# Altium PCB MasterBoardRevA.PcbDoc
Units mil, origin at the board's own origin, x right, y up, seen from the top; angles counter-clockwise.
Board outline 3993.07 x 3500.14 mil, 2 copper layers (Top Layer, Bottom Layer); 62 components, 48 nets, 251 pads, 28 vias.
Unrouted connection lines stored in the file: 2.
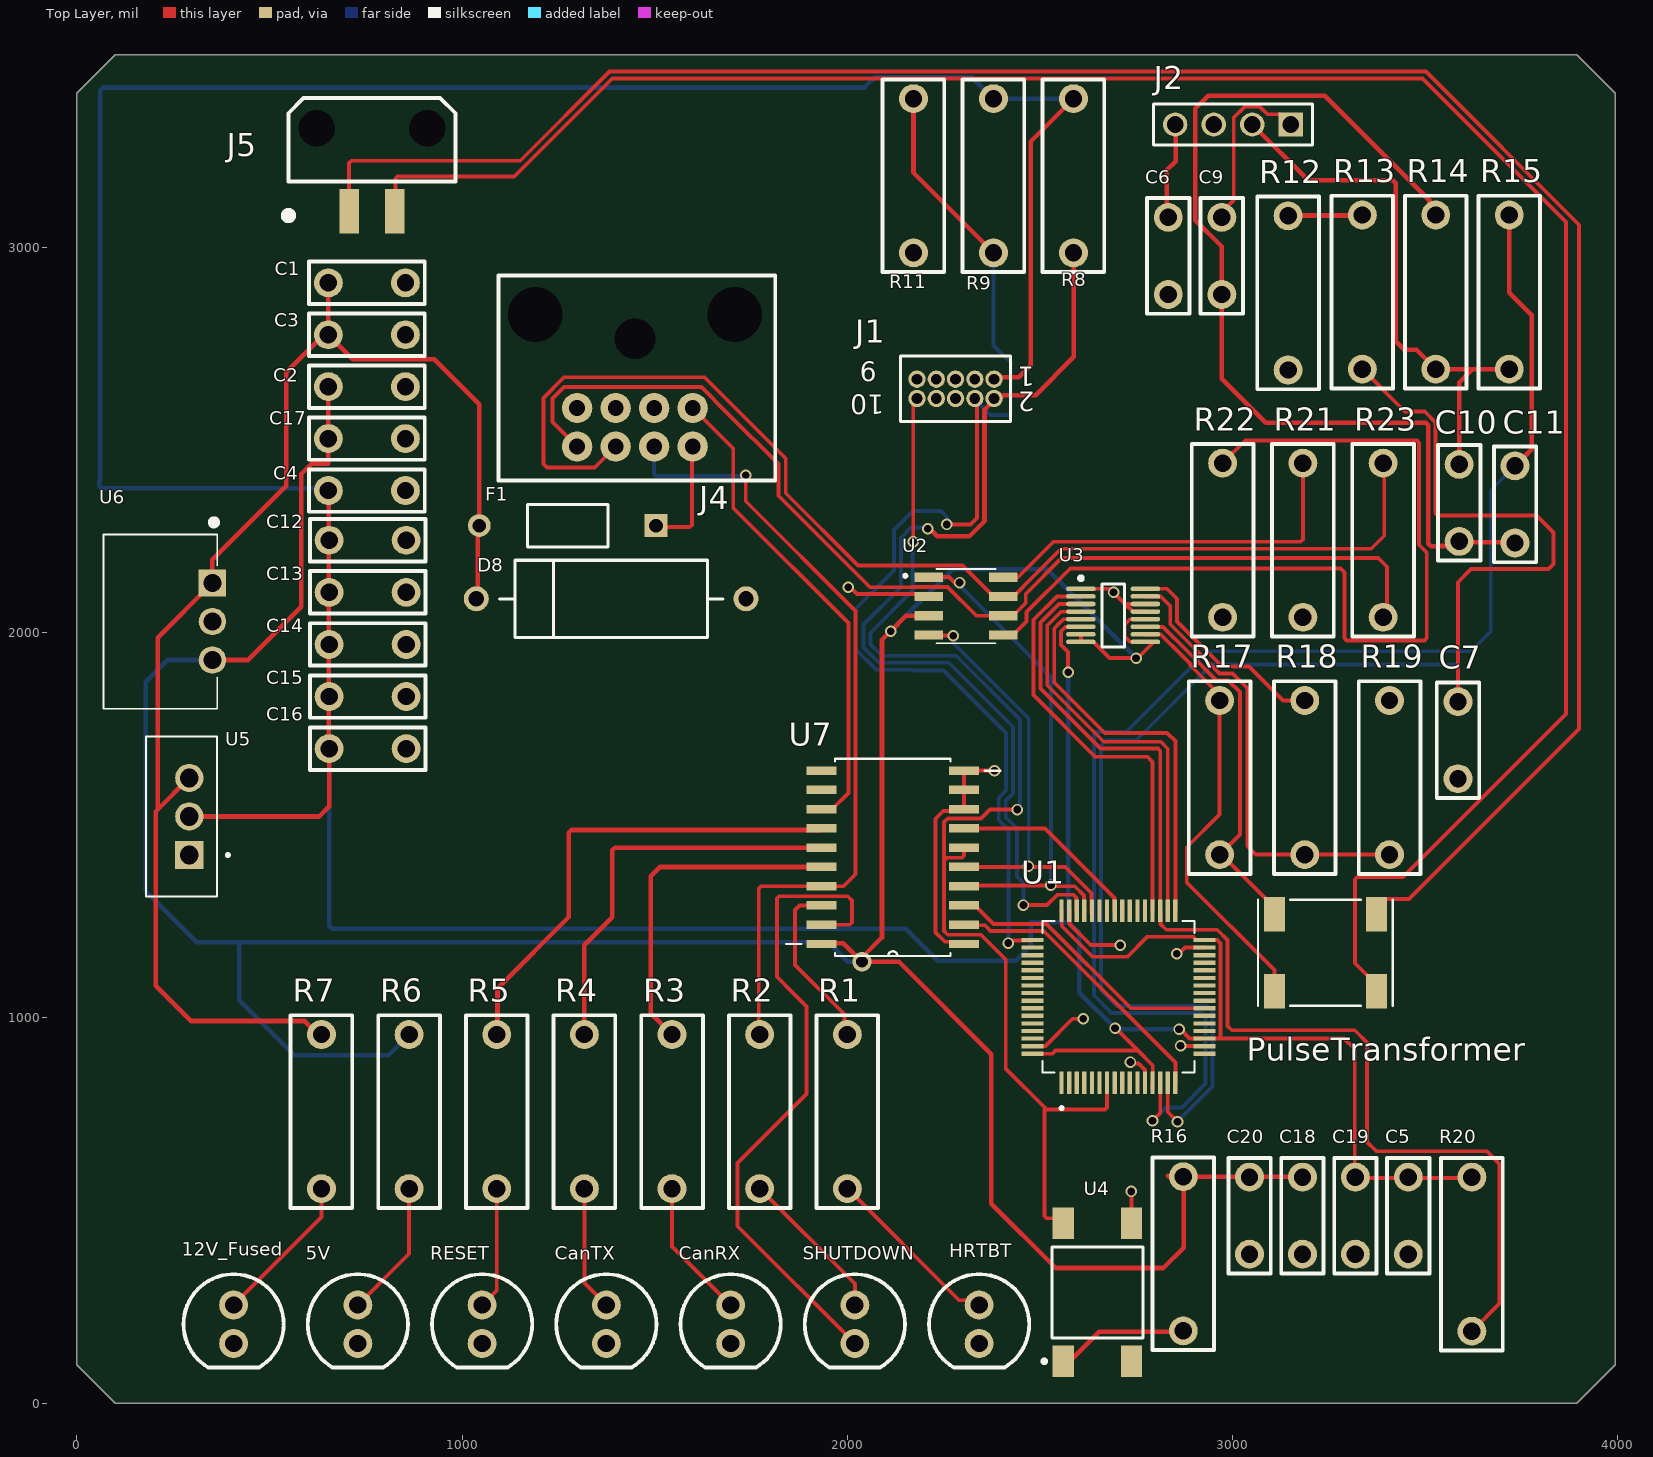
[diagram p0: Top Layer view]
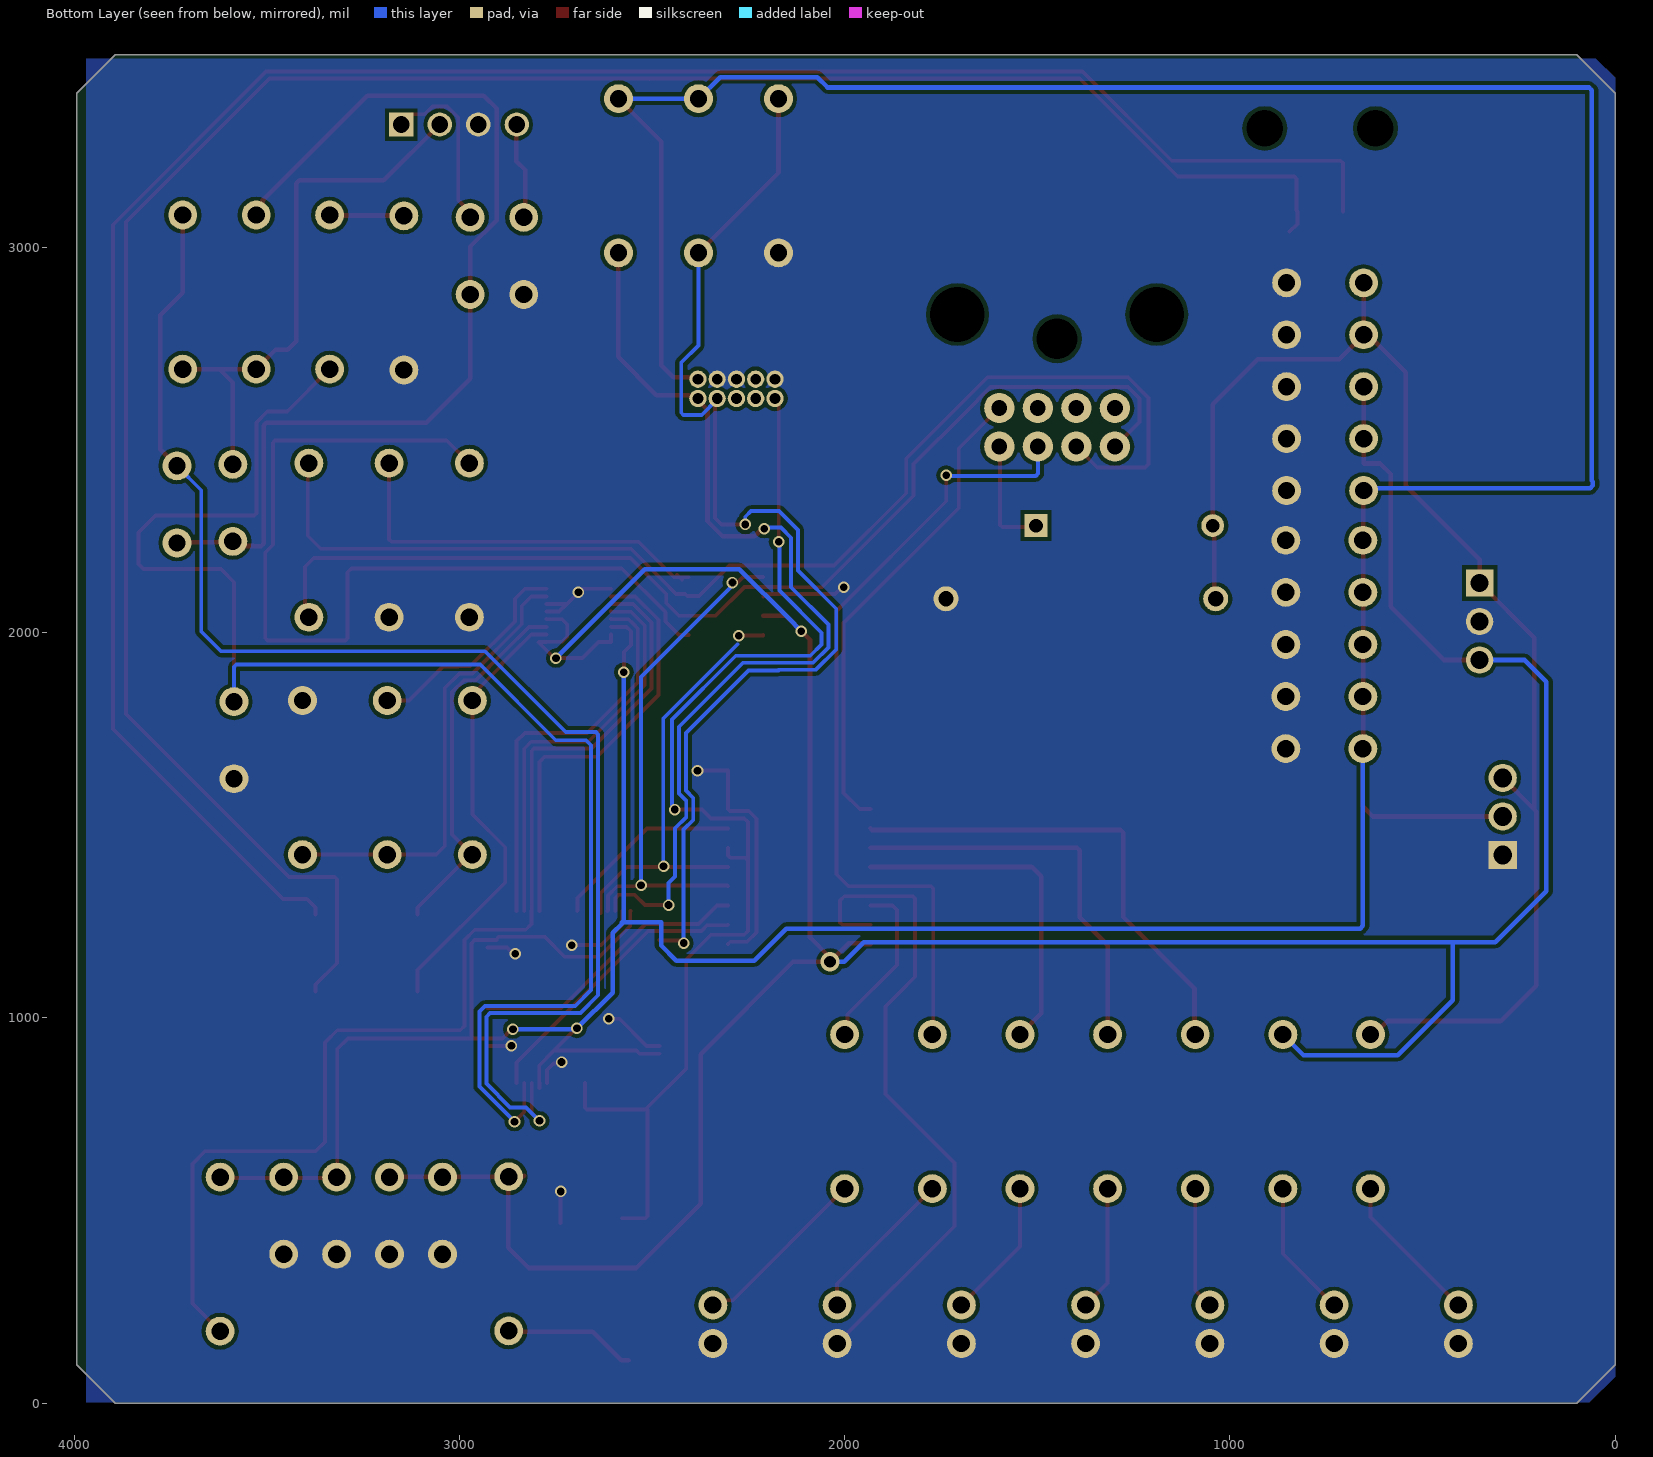
[diagram p1: Bottom Layer view, seen from below]
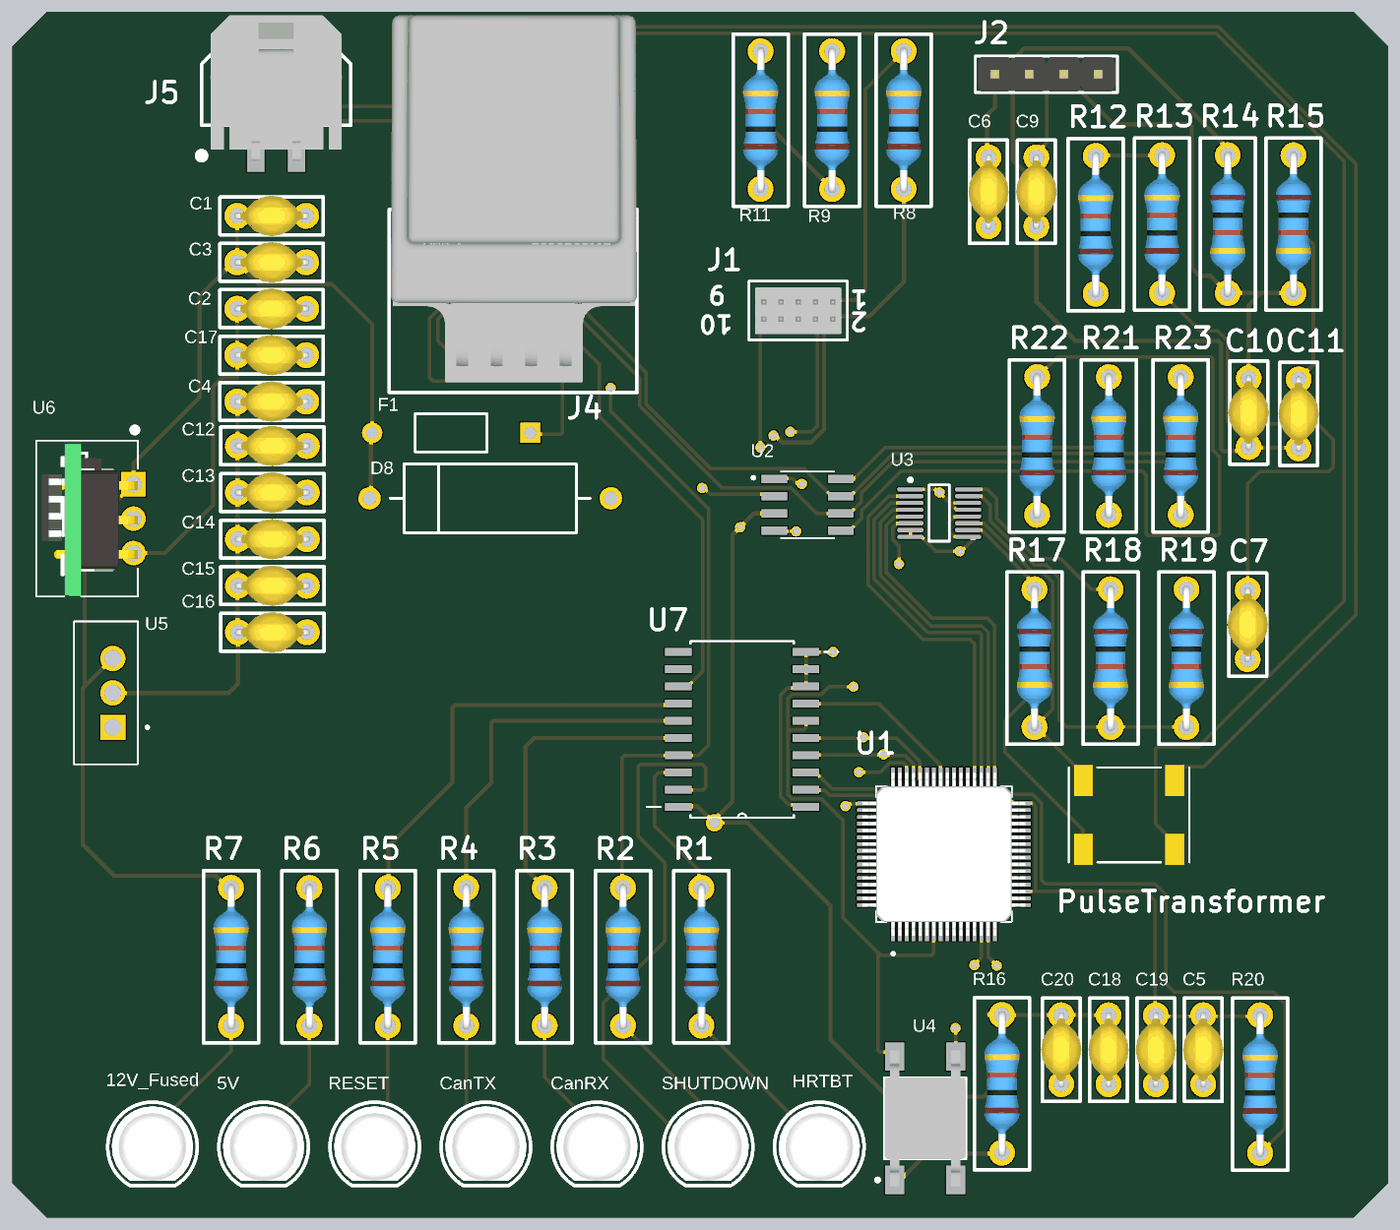
[diagram p2: 3D render of the assembled board from above, using the file's embedded part models]

## Layer stack, top to bottom
Top Solder: solder mask 0.4, Solder Resist, Dk 3.5
Top Layer: signal copper 1.4
Dielectric 1: dielectric 12.6, FR-4, Dk 4.8
Bottom Layer: signal copper 1.4
Bottom Solder: solder mask 0.4, Solder Resist, Dk 3.5

## Board outline
0,3400 100,3500 3893,3500 3993.07,3400 3993.07,100 3893,-0.14 100,0 0,100

## Design rules (kind name [scope] priority, off if disabled: settings)
Clearance [All] p1: gap=10 ignorepadtopadclearanceinfootprint=TRUE except(0: Arc-Hole Track-Hole SMDPad-Hole THPad-Hole Via-Hole Fill-Hole Poly-Hole Region-Hole Text-Hole; 8: Arc-Arc Arc-Track Arc-SMDPad Track-Track Track-SMDPad SMDPad-SMDPad)
PolygonConnect PolygonConnect_1 [All vs IsNamedPolygon('Bottom Layer-No Net')] p1: connectstyle=Direct reliefconductorwidth=10 reliefentries=4 polygonreliefangle="90 Angle" airgapwidth=10
PolygonConnect [All] p2: connectstyle=Relief reliefconductorwidth=10 reliefentries=4 polygonreliefangle="90 Angle" airgapwidth=10
RoomDefinition CONNECTORS [InComponentClass('CONNECTORS')] p1: confinementstyle=ConfineIn formatcopy=TRUE lockcomponents=FALSE outline 519.78,2998.72 519.78,3500.1 1079.33,3500.1 1079.33,3500.17 1827.83,3500.17 1827.83,3451 2682,3451 2682,3390.81 3225.76,3390.81 3225.76,3149 3813,3149 3813,2619 3803,2619 3803,2168 3655,2168 3655,1556 3526,1556 3526,322 2967,322 2967,123 2781.05,123 2781.05,52.61 2491.36,52.61 2491.36,2380.29 1079.33,2380.29 1079.33,2998.72
RoomDefinition COMMUNICATIONS [InComponentClass('COMMUNICATIONS')] p2: confinementstyle=ConfineIn formatcopy=TRUE lockcomponents=FALSE outline 2132.65,1951.72 2132.65,2186.28 2879,2186.28 2879,2505.1 3485.66,2505.1 3485.66,1888.9 3502.34,1888.9 3502.34,652 3716,652 3716,122 3526,122 3526,322 2974,322 2974,1358.9 2871.34,1358.9 2871.34,1931.65 2538.27,1931.65 2538.27,1951.72
RoomDefinition POWER [InComponentClass('POWER')] p3: confinementstyle=ConfineIn formatcopy=TRUE lockcomponents=FALSE outline 48.5,1781.8 48.5,2312.23 588,2312.23 588,2978 918,2978 918,2347.06 1546.86,2347.06 1546.86,2201.94 1783.48,2201.94 1783.48,1022 2095,1022 2095,350 2487,350 2487,77.42 262,77.42 262,1294.69 158.57,1294.69 158.57,1781.8
RoomDefinition PROCESSOR [InComponentClass('PROCESSOR')] p4: confinementstyle=ConfineIn formatcopy=TRUE lockcomponents=FALSE outline 588,2433.75 588,2573.75 918,2573.75 918,2310 920,2310 920,1686 2410,1686 2410,1327.76 2976.78,1327.76 2976.78,747.92 2430.8,747.92 2430.8,1148 1828,1148 1828,1629 590,1629 590,2433.75
RoutingVias [All] p1: holewidth=28 width=50 viastyle="Through Hole" minholewidth=28 minwidth=50 maxholewidth=28 maxwidth=50
SolderMaskExpansion [All] p1: expansion=4 istentingtop=FALSE
Width [All] p1: maxlimit=12 minlimit=8 preferedwidth=10 minimp=50.000000 maximp=50.000000 favimp=50.000000
30 further rules are at their usual default settings.

## Classes and differential pairs
component class PROCESSOR: C12 C13 C14 C15 C16 C17 U1 U7
component class POWER: 5V 12V_Fused C1 C2 C3 C4 CanRX CanTX D8 F1 HRTBT R1 R2 R3 R4 R5 R6 R7 RESET SHUTDOWN U5 U6
component class CONNECTORS: C5 C6 C7 C9 C10 C11 J1 J2 J4 J5 R8 R9 R11 R12 R13 R14 R15 R16 U4
component class COMMUNICATIONS: C18 C19 C20 PulseTransformer R17 R18 R19 R20 R21 R22 R23 U2 U3

## Components (designator, comment, footprint, x,y, rotation, side; value= is the part's Value field where it differs from the comment)
5V "Value?" "LED, TH" 729.5,205 r270 top
12V_Fused "Value?" "LED, TH" 407,205 r270 top
C1 "10uF" "Cap, 5mm TH, Ceramic" 753,2908 r180 top value=Value?
C2 "10uF" "Cap, 5mm TH, Ceramic" 753,2638.5 r180 top value=Value?
C3 "10uF" "Cap, 5mm TH, Ceramic" 753,2773.25 r180 top value=Value?
C4 "10uF" "Cap, 5mm TH, Ceramic" 753,2369 r180 top value=Value?
C5 "500nF" "Cap, 5mm TH, Ceramic" 3456,487 r90 top value=Value?
C6 "47nF" "Cap, 5mm TH, Ceramic" 2833,2978 r90 top value=Value?
C7 "10uF" "Cap, 5mm TH, Ceramic" 3585,1721 r90 top value=Value?
C9 "47nF" "Cap, 5mm TH, Ceramic" 2972,2978 r90 top value=Value?
C10 "47nF" "Cap, 5mm TH, Ceramic" 3588,2337 r90 top value=Value?
C11 "10uF" "Cap, 5mm TH, Ceramic" 3733,2333 r90 top value=Value?
C12 "100nF" "Cap, 5mm TH, Ceramic" 755,2240 r180 top value=Value?
C13 "100nF" "Cap, 5mm TH, Ceramic" 755,2104.75 r180 top value=Value?
C14 "100nF" "Cap, 5mm TH, Ceramic" 755,1969.5 r180 top value=Value?
C15 "100nF" "Cap, 5mm TH, Ceramic" 755,1834.25 r180 top value=Value?
C16 "100nF" "Cap, 5mm TH, Ceramic" 755,1699 r180 top value=Value?
C17 "100nF" "Cap, 5mm TH, Ceramic" 753,2503.75 r180 top value=Value?
C18 "100nF" "Cap, 5mm TH, Ceramic" 3181.33,487 r90 top value=Value?
C19 "100nF" "Cap, 5mm TH, Ceramic" 3318.67,487 r90 top value=Value?
C20 "100nF" "Cap, 5mm TH, Ceramic" 3044,487 r90 top value=Value?
CanRX "Value?" "LED, TH" 1697,205 r270 top
CanTX "Value?" "LED, TH" 1374.5,205 r270 top
D8 "D Zener" DIODE-0.7 1387,2088 r180 top
F1 "Fuse" PIN-W2/E2.8 1274,2278 r180 top
HRTBT "Value?" "LED, TH" 2342,205 r270 top
J1 "SAMTEC-FTSH-105-01-X-D" SAMTEC-FTSH-105-01-X-D 2281,2633 r180 top
J2 "4pin Header" 61300411121 3001,3319 r180 top
J4 "30700-5080" 30700-5080 1448.66,2533.09 r0 top
J5 "43650-0209" 43650-0209 766,3309 r180 top
PulseTransformer "PE-68386NLT" PE-68386NL_PUL 3241,1169 r0 top
R1 "Value?" "Resistor, TH" 2000,757 r90 top
R2 "Value?" "Resistor, TH" 1772.5,757 r90 top
R3 "Value?" "Resistor, TH" 1545,757 r90 top
R4 "Value?" "Resistor, TH" 1317.5,757 r90 top
R5 "Value?" "Resistor, TH" 1090,757 r90 top
R6 "Value?" "Resistor, TH" 862.5,757 r90 top
R7 "Value?" "Resistor, TH" 635,757 r90 top
R8 "100k" "Resistor, TH" 2587,3186 r90 top value=Value?
R9 "100k" "Resistor, TH" 2379.33,3186 r90 top value=Value?
R11 "100k" "Resistor, TH" 2171.67,3186 r90 top value=Value?
R12 "12k" "Resistor, TH" 3144,2882 r90 top value=Value?
R13 "160r" "Resistor, TH" 3336.67,2884 r90 top value=Value?
R14 "12k" "Resistor, TH" 3527.33,2884 r270 top value=Value?
R15 "160r" "Resistor, TH" 3718,2884 r270 top value=Value?
R16 "160r" "Resistor, TH" 2872,388 r90 top value=Value?
R17 "120r" "Resistor, TH" 2966.34,1623.9 r270 top value=Value?
R18 "806r" "Resistor, TH" 3187.34,1623.9 r270 top value=Value?
R19 "1.21k 5%" "Resistor, TH" 3407.34,1623.9 r270 top value=Value?
R20 "2k" "Resistor, TH" 3621,387 r90 top value=Value?
R21 "10k" "Resistor, TH" 3182.33,2240.1 r90 top value=Value?
R22 "120r" "Resistor, TH" 2974,2240.1 r90 top value=Value?
R23 "120r" "Resistor, TH" 3390.66,2240.1 r90 top value=Value?
RESET "Value?" "LED, TH" 1052,205 r270 top
SHUTDOWN "Value?" "LED, TH" 2019.5,205 r270 top
U1 "STM32F091RCT6" *QFP50P1200X1200X160-64N 2703.79,1054.77 r90 top
U2 "MCP2561-E/SN" *SOIC127P600X175-8N 2308,2069 r0 top
U3 "LTC6820IMS#TRPBF" LT-MS-16_M 2690,2045 r0 top
U4 "Reset Button" TECO-FSM4JSMA_V 2649,288 r180 top
U5 "LM1117T-3.3" TO254P1054X470X1955-3 292,1523 r90 top
U6 "VXO7805-1000" CONV_VXO7805-1000 352,2129 r270 top
U7 "74ACT541SC" SOIC127P1032X265-20N 2118,1417 r180 top

## Footprints (in the part's own frame and the unit in brackets; to place one, negate y for a bottom-side part, rotate by r counter-clockwise, add the part's x,y. Pads: shape width x height; smd on the part's side, far side on the other; paste and mask are expansions set on the pad)
30700-5080 [mm] "Molex 8 Pin High Density Header"
  round 2 hole 1.04: 1(3.81,-1.27) 2(1.27,-1.27) 3(-1.27,-1.27) 4(-3.81,-1.27) 5(3.81,1.27) 6(1.27,1.27) 7(-1.27,1.27) 8(-3.81,1.27)
  round 0 hole 3.6 unplated: ""(-6.57,7.44)
  round 0 hole 2.7 unplated: ""(0,5.84)
  round 3 hole 3.6 unplated: ""(6.57,7.44)
  silkscreen extent -9,-3.5 9.25,10, body extent -8.89,-2.75 9.25,24.31, height 18.06
43650-0209 [mm] "Molex 2 Position Board Header, Right Angle"
  rect 1.27x2.92 smd: 1(1.5,5.47) 2(-1.5,5.47)
  round 0 hole 2.41 unplated: ""(-3.65,0) ""(3.65,0)
  silkscreen extent -5.5,-2 5.7,5.95, body extent -4.82,-4.6 4.83,6.14, height 5.64
61300411121 [mm] "Pin Header, pitch 2.54 mm, THT, Vertical, single row, 4p"
  rect 1.6x1.6 hole 1.1: 1(-3.81,0)
  round 1.6 hole 1.1: 2(-1.27,0) 3(1.27,0) 4(3.81,0)
  silkscreen extent -5.23,-1.35 5.23,1.35, body extent -5.08,-1.27 5.08,1.27, height 8.57
*QFP50P1200X1200X160-64N [mm]
  rect 1.47x0.28 smd: 1(-5.67,3.75) 2(-5.67,3.25) 3(-5.67,2.75) 4(-5.67,2.25) 5(-5.67,1.75) 6(-5.67,1.25) 7(-5.67,0.75) 8(-5.67,0.25) 9(-5.67,-0.25) 10(-5.67,-0.75) 11(-5.67,-1.25) 12(-5.67,-1.75) 13(-5.67,-2.25) 14(-5.67,-2.75) 15(-5.67,-3.25) 16(-5.67,-3.75) 33(5.67,-3.75) 34(5.67,-3.25) 35(5.67,-2.75) 36(5.67,-2.25) 37(5.67,-1.75) 38(5.67,-1.25) 39(5.67,-0.75) 40(5.67,-0.25) 41(5.67,0.25) 42(5.67,0.75) 43(5.67,1.25) 44(5.67,1.75) 45(5.67,2.25) 46(5.67,2.75) 47(5.67,3.25) 48(5.67,3.75)
  rect 0.28x1.47 smd: 17(-3.75,-5.67) 18(-3.25,-5.67) 19(-2.75,-5.67) 20(-2.25,-5.67) 21(-1.75,-5.67) 22(-1.25,-5.67) 23(-0.75,-5.67) 24(-0.25,-5.67) 25(0.25,-5.67) 26(0.75,-5.67) 27(1.25,-5.67) 28(1.75,-5.67) 29(2.25,-5.67) 30(2.75,-5.67) 31(3.25,-5.67) 32(3.75,-5.67) 49(3.75,5.67) 50(3.25,5.67) 51(2.75,5.67) 52(2.25,5.67) 53(1.75,5.67) 54(1.25,5.67) 55(0.75,5.67) 56(0.25,5.67) 57(-0.25,5.67) 58(-0.75,5.67) 59(-1.25,5.67) 60(-1.75,5.67) 61(-2.25,5.67) 62(-2.75,5.67) 63(-3.25,5.67) 64(-3.75,5.67)
  silkscreen extent -7.44,-5 5,5, body extent -6,-6 6,6, height 1.56
*SOIC127P600X175-8N [mm]
  rect 1.9x0.6 smd: 1(-2.455,1.905) 2(-2.455,0.635) 3(-2.455,-0.635) 4(-2.455,-1.905) 5(2.455,-1.905) 6(2.455,-0.635) 7(2.455,0.635) 8(2.455,1.905)
  silkscreen extent -4.1,-2.45 1.95,2.45
"Cap, 5mm TH, Ceramic" [mil] "Through Hole Cap, Ceramic"
  round 75 hole 45: 1(-100,0) 2(100,0)
  silkscreen extent -150,-55 150,55, body extent -109,-59 109,59, height 176
CONV_VXO7805-1000 [mm]
  rect 1.8x1.8 hole 1.2: 1(0,0)
  round 1.8 hole 1.2: 2(2.54,0) 3(5.08,0)
  silkscreen extent -4.2,-7.18 8.29,0.32, body extent -3.21,-6.76 8.38,0.32, height 17.5
DIODE-0.7 [mm] "Diode, Thru-Hole; 2 Leads; 0.7 in Pin Spacing"
  round 1.65 hole 1: 1(-8.89,0) 2(8.89,0)
  silkscreen extent -7.37,-2.54 7.37,2.54
"LED, TH" [mil] "Through Hole LED"
  round 75 hole 45: 1(-50,0) 2(50,0)
  silkscreen extent -130,-130 113,130, body extent -118,-118 98,118, height 346
LT-MS-16_M [mm] "SOP, 16-Leads, Body 4.04x3.00mm, Pitch 0.50mm, IPC Low Density"
  oval 1.95x0.3 smd: 1(-2.125,1.75) 2(-2.125,1.25) 3(-2.125,0.75) 4(-2.125,0.25) 5(-2.125,-0.25) 6(-2.125,-0.75) 7(-2.125,-1.25) 8(-2.125,-1.75) 9(2.125,-1.75) 10(2.125,-1.25) 11(2.125,-0.75) 12(2.125,-0.25) 13(2.125,0.25) 14(2.125,0.75) 15(2.125,1.25) 16(2.125,1.75)
  silkscreen extent -2.25,-2.08 0.75,2.57, body extent -1.55,-2.05 1.55,2.05, height 1.1
PE-68386NL_PUL [mil]
  rect 55x90 smd paste-27.5 mask+0: 1(-132.5,100) 2(-132.5,-100) 3(132.5,-100) 4(132.5,100)
  silkscreen extent -175,-138 175,138, body extent 0,0 10,10, height 10
PIN-W2/E2.8 [mm] "Thru-Hole; 2 Leads"
  rect 1.5x1.5 hole 0.9: 1(-5.825,0)
  round 1.5 hole 0.9: 2(5.825,0)
  silkscreen extent -2.65,-1.4 2.65,1.4
"Resistor, TH" [mil] "Axial Through Hole Resistor"
  round 75 hole 45: 1(-200,0) 2(200,0)
  silkscreen extent -250,-80 250,80, body extent -211,-51 211,51, height 106
SAMTEC-FTSH-105-01-X-D [mil]
  round 45 hole 27.95 mask+0: 1(-100,-25) 2(-100,25) 3(-50,-25) 4(-50,25) 5(0,-25) 6(0,25) 7(50,-25) 8(50,25) 9(100,-25) 10(100,25)
  silkscreen extent -143,-85 143,85, body extent -125,-67 125,68, height 219
SOIC127P1032X265-20N [mil]
  rect 78x22 smd: 1(-185,225) 2(-185,175) 3(-185,125) 4(-185,75) 5(-185,25) 6(-185,-25) 7(-185,-75) 8(-185,-125) 9(-185,-175) 10(-185,-225) 11(185,-225) 12(185,-175) 13(185,-125) 14(185,-75) 15(185,-25) 16(185,25) 17(185,75) 18(185,125) 19(185,175) 20(185,225)
  silkscreen extent -279,-256 277,256
TECO-FSM4JSMA_V [mm] "SMD, 4-Leads, Body 6x6mm, Pitch 4.5mm"
  rect 1.4x2.1 smd: 1(2.25,4.55) 2(2.25,-4.55) 3(-2.25,4.55) 4(-2.25,-4.55)
  silkscreen extent -3,-3 3.62,4.67, body extent -3,-5 3,5, height 5.08
TO254P1054X470X1955-3 [mm]
  rect 1.86x1.86 hole 1.24: 1(-2.54,0)
  round 1.86 hole 1.24: 2(0,0) 3(2.54,0)
  silkscreen extent -5.27,-2.64 5.27,2.86

## Part data
5V 12V_Fused CanRX CanTX HRTBT RESET SHUTDOWN: library part "LED, TH", "LED, 5mm, TH", Published=22Oct2016, Publisher=T.Tallo, Status=Active, TargetLibrary=RITRacing-LED's
C1 C2 C3 C4 C5 C6 C7 C9 C10 C11 C12 C13 C14 C15 C16 C17 C18 C19 C20: library part "Cap, 5MM TH, Ceramic", "Generic Cap, 5MM TH, Ceramic", Published=22Oct2016, Publisher=T.Tallo, Status=Active, TargetLibrary=RITRacing-Passives
D8: "Zener Diode", LatestRevisionDate=17-Jul-2002, LatestRevisionNote="Re-released for DXP Platform.", PackageDescription="Diode, Thru-Hole; 2 Leads; 0.7 in Pin Spacing", PackageReference=DIODE-0.7, Published=8-Jun-2000, Publisher="Altium Limited"
F1: library part "Fuse 2", LatestRevisionDate=17-Jul-2002, LatestRevisionNote="Re-released for DXP Platform.", PackageDescription="Thru-Hole; 2 Leads", PackageReference=PIN-W2/E2.8, Published=8-Jun-2000, Publisher="Altium Limited"
J1: "Connector Header Through Hole 10 position 0.050\" _1.27mm_", Package=None, Availability=Unavailable, MF=Samtec, MP=FTSH-105-01-F-D, Price=None, SnapEDA_Link=https://www.snapeda.com/parts/FTSH-105-01-F-D/Samtec%20Inc./view-part/105348/?ref=snap
J2: library part CMP-1502-01064-1, "THT Vertical Pin Header WR-PHD, Pitch 2.54 mm, Single Row, 4 pins", Contact Resistance=20mOhm, Manufacturer="Wurth Elektronik", Operating Temperature=-40to105degC, Package Reference=61300411121, Rated Current=3A, Withstanding Voltage=500VAC, Working Voltage=250VAC, Datasheet URL=https://katalog.we-online.de/em/datasheet/6130xx11121.pdf, Gender=Male, Manufacturer URL=http://www.we-online.de, Mounting Technology=THT, Orientation=Vertical, Packaging=Bag, Part Number=61300411121, Pin Number=4, Pitch=2.54mm, Publisher=WurthElektronik, Row Number=Single
J4: "Molex 8 Position High Density Board Header", Manufacturer=Molex, ComponentLink1Description=Datasheet, ComponentLink1URL=http://www.molex.com/molex/products/datasheet.jsp?part=active/0307004081_PCB_HEADERS.xml, PartNumber=30700-5080, Published=22Oct2016, Publisher=T.Tallo, Status=Active, TargetLibrary=RITRacing-Connectors
J5: "Molex 2 Position Board Header, RIght Angle", Manufacturer=Molex, Voltage=600V, ComponentLink1Description=Datasheet, ComponentLink1URL=http://www.mouser.com/ds/2/418/NG_CD_1445088_A1-614413.pdf, PartNumber=43650-0209, Published=13Aug2018, Publisher=T.Tallo, Status=Active, TargetLibrary=RITRacing-Connectors
PulseTransformer: "No Description Available", Built_By=EMA_Cory, Copyright="Copyright (C) 2018 Accelerated Designs. All rights reserved", Manufacturer_Part_Number=PE-68386NLT, RefDes=RefDes, SourceLibrary=Pulse_Electronics_2019-12-18, Type=DEV, Vendor="Pulse Electronics Corporation"
R1 R2 R3 R4 R5 R6 R7 R8 R9 R11 R12 R13 R14 R15 R16 R17 R18 R19 R20 R21 R22 R23: library part "Resistor, TH", "Generic TH Resistor", Published=22Oct2016, Publisher=T.Tallo, Status=Active, TargetLibrary=RITRacing-Passives
U1: library part CMP-12105-000069-1, "IC MCU 32BIT 256KB FLASH 64LQFP", Ambient Temperature Range High=+85°C, Ambient Temperature Range Low=-40°C, Frequency=48MHz, Manufacturer=STMicroelectronics, Max Junction Temp=+105°C, Max Supply Voltage=3.6V, Min Supply Voltage=2V, Nominal Supply Current=0.9-26.9mA, Package=LQFP64-5W, Temperature="-40°C to +85°C", Automotive=No, Category=IC, ComponentLink2Description=Datasheet, ComponentLink2URL=https://www.st.com/resource/en/datasheet/stm32f091rc.pdf, Core Architecture="ARM Cortex-M0", Data Bus Width=32bits, Device Class L1="Integrated Circuits (ICs)", Device Class L2="Embedded Processors and Controllers", Device Class L3=Microcontrollers, Digikey Description="IC MCU 32BIT 256KB FLASH 64LQFP", Height=1.6mm, Interface=I2C,SPI,USART,CAN,LIN,IrDA,I2S,SMBus, Ipc Land Pattern Name=QFP50P1200X1200X160-64, Lead Free=Yes, Manufacturer Part Number=STM32F091RCT6, Memory Size=256KBytes, Memory Type=FLASH, Mouser Description="ARM Microcontrollers - MCU 16/32-BITS MICROS", Number Of A/D Converters=1, Number Of Adc Channels=19, Number Of Cores=1, Number Of I2C Channels=2, Number Of I/Os=52, Number Of Pwm Channels=6, Number Of Spi Channels=2, Number Of Timers/Counters=10, Number Of Uart Channels=8, Octopart=https://octopart.com/stm32f091rct6-stmicroelectronics-51988683, Ram Size=32KBytes, RoHS=TRUE, Standoff Height=0.05mm, Temperature Range High=+85°C, Temperature Range Low=-40°C
U2: "1/1 Transceiver Half CANbus 8-SOIC", Package="SOIC-8 Microchip", Availability=Unavailable, MF=Microchip, MP=MCP2561-E/SN, Price=None, SnapEDA_Link=https://www.snapeda.com/parts/MCP2561-E/SN/Microchip/view-part/46593/?ref=snap
U3: library part CMP-0937-00011-1, "IsoSPI Isolated Communication Interface, 2.7 to 5.5 V, -40 to 85 degC, 16-Pin MSOP (MS), Pb-Free, Tape and Reel", IO Supply Current="1 uA Max.", IO Supply Voltage Range="1.7 to 5.5 V", Manufacturer="Linear Technology", Power Supply="2.7 to 5.5 V", Receiver Input Resistance="35 kOhm", Supply Current, IDLE State="2 uA", Temperature Range (degC)="-40 to 85", ComponentLink1Description="Manufacturer URL", ComponentLink1URL=http://www.linear.com/, ComponentLink2Description=Datasheet, ComponentLink2URL=http://cds.linear.com/docs/en/datasheet/6820fa.pdf, ComponentLink3Description="Package Specification", ComponentLink3URL=http://cds.linear.com/docs/en/packaging/05081669_A_MS16.pdf, DatasheetVersion="Rev. A", Mounting Technology="Surface Mount", PackageDescription="16-Pin Micro Small Outline Package, Body 4.039 x 3 mm, Pitch 0.5 mm", PackageReference=MS-16, PackageVersion="Rev. A", Packing="Tape and Reel", PartNumber=LTC6820IMS#TRPBF, VBIAS="1.9 to 2.1 V"
U4: library part CMP-2000-07488-1, "Swicth, SPST, 24 V, -35 to 85 degC, 4-Pin SMD, RoHS, Tape and Reel", Case\/Package=SMD/SMT, Contact Current Rating=50mA, Contact Resistance=100mOhm, Manufacturer="TE Connectivity", Max Operating Temperature=85degC, Max Voltage Rating (DC)=12V, Min Operating Temperature=-35degC, Operating Force=1.57N, Package Description="4-Pin Surface Mount Device, Body 6 x 6 mm, Pitch 4.5 mm", Package Quantity=750, Package Reference=FSM4JSMA, Voltage Rating=24V, Actuator Length=0.055inch, Actuator Material=Polyamide, Contact Material=CopperAlloy, Contact Plating=Silver, Current Rating=50mA, Datasheet URL=http://www.te.com/commerce/DocumentDelivery/DDEController?Action=showdoc&DocId=Customer+Drawing%7F2-1437565-7%7FV%7Fpdf%7FEnglish%7FENG_CD_2-1437565-7_V.pdf%7F4-1437565-2, Datasheet Version="Rev. V, 02/2015", Electrical Life=100000Cycles, Illumination Type=Illuminated, Length=6mm, Manufacturer URL=http://www.te.com/, Mechanical Life=100000Cycles, Mount=SurfaceMount, Mounting Technology=SurfaceMount, Orientation=Straight, Packaging=LoosePiece, REACH SVHC=Unknown, RoHSCompliant=true, Switch Travel=0.25mm, Termination=GullWing, Throw Configuration=SPST, Voltage Rating (DC)=24V, Width=6mm
U5: "800-mA 15-V linear voltage regulator 3-TO-220 0 to 125", Package="TO-220-3 Texas Instruments", Arrow_Electronics-Purchase-URL=https://snapeda.com/shop?store=Arrow+Electronics&id=22275, Availability=https://www.mouser.com/ProductDetail/Texas-Instruments/LM1117T-33-NOPB?qs=X1J7HmVL2ZF7RIQB6O0mNg%3D%3D&gclid=Cj0KCQjwvvj5BRDkARIsAGD9vlJnD1MNOYBTPv7FHDAskkwDQ_PuLBSV-edvQAne3qvGjGEuZX3qJSwaAtIgEALw_wcB, DigiKey-Purchase-URL=https://snapeda.com/shop?store=DigiKey&id=22275, MF="Texas Instruments", Mouser-Purchase-URL=https://snapeda.com/shop?store=Mouser&id=22275, MP=LM1117T-3.3/NOPB, Price=None, SnapEDA_Link=https://www.snapeda.com/parts/LM1117T-3.3/NOPB/Texas%20Instruments/view-part/22275/?ref=snap, Texas_Instruments-Purchase-URL=https://snapeda.com/shop?store=Texas+Instruments&id=22275
U7: "Buffer, Non-Inverting 1 Element 8 Bit per Element 3-State Output 20-SOIC", Package="SOIC-20 Fairchild Semiconductor", Arrow_Electronics-Purchase-URL=https://snapeda.com/shop?store=Arrow+Electronics&id=431052, Availability=Warning, DigiKey-Purchase-URL=https://snapeda.com/shop?store=DigiKey&id=431052, MF="ON Semiconductor", Mouser-Purchase-URL=https://snapeda.com/shop?store=Mouser&id=431052, MP=74ACT541SC, Price=None, SnapEDA_Link=https://www.snapeda.com/parts/74ACT541SC/ON%20Semiconductor/view-part/431052/?ref=snap

## Via types
v1: diameter 30, hole 20, Top Layer to Bottom Layer, 27 vias
v2: diameter 50, hole 30, Top Layer to Bottom Layer, 1 vias

## Nets (pads, with @x,y where several pads share a name; then routed paths per layer and width w, separated by ;. In a path a pad name is that pad's centre, name@x,y a point inside that pad or via, vN(x,y) a via of type N, cw(c..) or ccw(c..) an arc to the next point about the centre after c; other vN are vias at no path point)
12V_Fused: C9.2 J2.1 | length 450.8
  Top Layer w10: C9.2 2972,3090.69 3002.78,3121.47 3002.78,3336.54 3031.74,3365.5 3070.26,3365.5 3090.26,3345.5 3124.5,3345.5 J2.1
12V_Fused: C1.2 C3.2 D8.2 F1.2 R7.2 U5.3 U6.1 | length 3589.5
  Top Layer w12: U5.3 210,1541 ; R7.2 626.51,957 591.51,992 297,992 205,1084 205,1536 210,1541 ; C1.2 C3.2 ; D8.2 1040.83,2091.83 1040.83,2274.17 F1.2 1044.67,2593.33 928,2710 716.25,2710 C3.2 ; 210,1541 210,1987 U6.1 352,2189 544,2381 544,2675.62 629.57,2761.2 640.95,2761.2 C3.2
CanRx: U1.45 U2.1 U7.4 | length 1334.4
  Top Layer w10: U2.1 2212.35,2145 2263.94,2145 2281.01,2127.93 2289.29,2127.93 v1(2291.4,2130.03) ; U7.4 2304.4,1343.4 2527.06,1343.4 v1(2528.46,1344.8) ; v1@2529,1342 2590.12,1342 2614.69,1317.43 2614.69,1278.51 U1.45
  Bottom Layer w10: v1(2291.4,2130.03) 2291.4,2122.57 2529,1884.97 2529,1345.34 v1(2528.46,1344.8)
CanRx_FromBuff: R3.2 U7.16 | length 887
  Top Layer w12: R3.2 1489.67,1012.33 1489.67,1367.67 1514,1392 U7.16
CanTx: U1.44 U2.4 U7.5 | length 1131.6
  Top Layer w10: U2.4 2212.35,1993 2274,1993 v1(2275,1992) ; U7.5 2470,1392 2565.58,1392 2633.72,1323.86 U1.44@2633.72,1272
  Bottom Layer w10: 2278,1970 2471,1777 2471,1395 v1(2470,1394)
CanTx_FromBuff: R4.2 U7.15 | length 1053.9
  Top Layer w12: R4.2 1317.5,1188.5 1390,1261 1390,1434.97 1397.03,1442 U7.15
ChargeSignal: U1.41 U7.7 | length 499
  Top Layer w10: U7.7 2513.09,1492 2693.43,1311.66 2693.43,1278.51 U1.41
ChargeSignal_FromBuff: J4.5 U7.13 | length 1254
  Top Layer w10: J4.5 1704,2477.75 1704,2324 2003,2025 2003,1584 1961,1542 U7.13
GND: 5V.2 12V_Fused.2 C1.1 C2.1 C3.1 C4.1 C5.1 C6.1 C7.1 C12.1 C13.1 C14.1 C15.1 C16.1 C17.1 C18.1 C19.1 C20.1 CanRX.2 CanTX.2 D8.1 HRTBT.2 J1.3 J1.5 J1.9 J2.3 R11.1 R12.1 R19.1 R21.1 R22.1 RESET.2 SHUTDOWN.2 U1.12 U1.18 U1.31 U1.47 U1.63 U2.2 U3.1 U3.13 U3.14 U4.4 U5.1 U6.2 U7.1 U7.8 U7.9 U7.10 U7.19 | length 3531.7
  Top Layer w10: U7.19 2006.14,1242 2012,1247.86 2012,1305 2001,1316 1822.86,1316 1817,1310.14 1817,1106.86 1857.66,1066.19 1857.81,1066.19 1894,1030 1894,803 1715,624 1715,459.5 SHUTDOWN.2 ; v1(2002,2118) 2007,2118 2025,2100 2205.35,2100 U2.2 ; U7.1 2297,1198 2253.16,1198 2229,1222.16 2229,1517.14 2249,1537.14 2298.14,1537.14 U7.8 U7.9 U7.10 v1(2382,1642) ; U1.63 2481.07,927.33 2514.22,927.33 2584.89,998 v1(2612,998) ; U1.47 2576.35,1277.49 2576.35,1244.34 2631.69,1189 v1(2708,1189) ; U3.1 2682.1,2113.9 2721.13,2074.87 ; v1(2691,2105) 2721.13,2074.87 ; v1(2734.78,885.48) 2738.61,881.65 2755.72,881.65 2772.17,865.2 U1.12@2772.17,831.54 ; v1(2737.26,549.74) 2737.58,549.42 U4.4 ; U3.13 2741.16,2054.84 2721.13,2074.87 ; U3.14 2773.32,2074.87 2721.13,2074.87 ; v1(2855,1167) 2860.41,1167 2876.14,1182.72 U1.31 ; v1(2865,928) 2865.67,927.33 2926.5,927.33 U1.18
HEARTBEAT: R1.2 U7.18 | length 453.3
  Top Layer w10: U7.18 1876,1292 1864,1280 1864,1137.86 1992.36,1009.5 1992.36,964.64 R1.2
HEARTBEAT_BUFF: U1.16 U7.2 | length 749.4
  Top Layer w10: U7.2 2304.46,1240.54 2357,1240.54 2371.54,1226 2509.8,1226 2851.43,884.38 U1.16
IM: PulseTransformer.2 R17.1 U3.10 | length 1159.3
  Top Layer w10: U3.10 2774.01,1995.44 2813.54,1995.44 2866,1942.98 2890.55,1918.43 2890.55,1914.86 2896.41,1909 2966.34,1839.07 R17.1 2966.34,1528.34 2881,1443 2881,1352 3108.5,1124.5 PulseTransformer.2
IM_Out_Connector: J5.2 PulseTransformer.3 | length 5762.9
  Top Layer w10: J5.2@845.06,3041.17 825.06,3061.17 J5.2 827,3095.59 827,3178.14 832.86,3184 1135.46,3184 1389.88,3438.42 1961.11,3438.42 cw(c1964,3386) 1966.89,3438.42 2168.78,3438.42 cw(c2171.67,3386) 2174.56,3438.42 2376.44,3438.42 cw(c2379.33,3386) 2382.22,3438.42 2505.7,3438.42 2506.81,3437.31 2508,3438.5 3492.5,3438.5 3865,3066 3865,1789 3442,1366 3323.86,1366 3318,1360.14 3318,1142 3373.5,1086.5 PulseTransformer.3
IP: PulseTransformer.1 R17.2 U3.11 | length 975.6
  Top Layer w10: U3.11 2774.01,2015.13 2819.31,2015.13 2821,2013.44 2884,1950.44 2958.04,1876.4 2988.08,1876.4 3018.84,1845.64 3018.84,1476.4 R17.2 2971.1,1423.9 3108.5,1286.5 PulseTransformer.1
IP_Out_Connector: J5.1 PulseTransformer.4 | length 5624.5
  Top Layer w10: J5.1 706.94,3219.14 712.8,3225 1151,3225 1382.5,3456.5 3501.5,3456.5 3899,3059 3899,1750 3458,1309 3396,1309 3373.5,1286.5 PulseTransformer.4
MISO: R20.1 U1.35 U3.3 | length 3008
  Top Layer w10: U3.3 2549.49,2074.53 2500.95,2025.99 2500.95,1854.91 2656.86,1699 2806.2,1699 2812.06,1693.14 U1.35 2812.57,1277.49 2812.57,1244.34 2827.91,1229 2960.05,1229 2986.95,1202.1 2986.95,978.91 2997.86,968 3317,968 3348.5,936.5 3348.5,678.5 3373,654 3660,654 3693,621 3693,259 R20.1
Net5V_1: 5V.1 R6.1 | length 357.1
  Top Layer w10: 5V.1 862.5,388 R6.1
Net12V_Fused_1: 12V_Fused.1 R7.1 | length 396.4
  Top Layer w10: 12V_Fused.1 635,483 R7.1
NetC6_2: C6.2 J2.4 R12.2 R13.2 | length 422.4
  Top Layer w12: C6.2@2829,3100 2829,3201 2852,3224 2852,3318 J2.4 ; R12.2 3145,3083 3335.67,3083 R13.2
NetC7_2: C7.2 R13.1 U1.15 | length 3958.8
  Top Layer w10: U1.15 2831.74,756.26 v1(2857,731) ; R13.1 3446.67,2574 3498.84,2574 3527,2545.84 3527,2309.86 3532.86,2304 3789,2304 3833,2260 3833,2178 3820,2165 3619,2165 3585,2131 C7.2
  Bottom Layer w10: v1(2857,731) 2948,822 2948,1016.46 2933.46,1031 2699.31,1031 2658,1072.31 2658,1708 2671,1721 2750,1721 2946,1917 3579.14,1917 3585,1911.14 C7.2
NetC9_1: C9.1 C10.1 C11.1 R14.1 | length 2636.7
  Top Layer w12: R14.1 3527.33,3101.05 3510.92,3117.46 3510.92,3122.08 3239,3394 2937,3394 2903.5,3360.5 2903.5,3070.84 2972,3002.34 C9.1 2972,2659 3086,2545 3500.97,2545 3508,2537.97 3508,2231.03 3515.03,2224 3533.95,2224 3534.9,2224.95 3575.95,2224.95 C10.1 3590,2235 3731,2235 C11.1
NetC10_2: C10.2 J2.2 R14.2 R15.2 | length 1431.5
  Top Layer w12: J2.2 3196,3174 3415.97,3174 3423,3166.97 3423,2757 3446,2734 3477.33,2734 R14.2 3622.67,2684 ; C10.2 3588,2649.33 3622.67,2684 ; R15.2 3622.67,2684
NetC11_2: C11.2 R15.1 U1.14 | length 3738.3
  Top Layer w10: v1(2792,733) 2812.06,753.06 U1.14
  Top Layer w12: R15.1 3718,2882.48 3776,2824.48 3776,2476 C11.2
  Bottom Layer w10: v1(2792,733) 2826.73,767.73 2868.27,767.73 2930,829.46 2930,1003.14 2920.14,1013 2686,1013 2640,1059 2640,1736.14 2645.86,1742 2724,1742 2934,1952 3619.14,1952 3669.85,2002.71 3669.85,2369.85 C11.2
NetCanRX_1: CanRX.1 R3.1 | length 365
  Top Layer w10: R3.1 1545,407 CanRX.1
NetCanTX_1: CanTX.1 R4.1 | length 325.6
  Top Layer w10: R4.1 1317.5,312 CanTX.1
NetF1_1: F1.1 J4.1 | length 300
  Top Layer w10: F1.1@1503.33,2274 1591.14,2274 1597,2279.86 1597,2481.43 J4.1
NetHRTBT_1: HRTBT.1 R1.1 | length 467.1
  Top Layer w10: R1.1 2289.56,267.44 2329.56,267.44 HRTBT.1
NetJ4_3: J4.3 R23.2 U2.7 | length 3121.3
  Top Layer w10: J4.3 1344.29,2428.72 1220.28,2428.72 1211,2438 1211,2609 1265,2663 1629,2663 1840,2452 1840,2362 2028,2174 2299.06,2174 2378.06,2095 2408.16,2095 2413.97,2100.81 2437.51,2100.81 2476,2139.3 2554.7,2218 3360,2218 3393.66,2251.66 R23.2@3393.66,2430
NetJ4_4: J4.4 R23.1 U2.6 | length 2844.7
  Top Layer w10: J4.4 1235,2546.75 1235,2607.54 1264.91,2637.46 1621.18,2637.46 1688,2570.64 1821,2437.64 1821,2355.54 2058.54,2118 2167.75,2118 2168.56,2118.81 2260.19,2118.81 2335,2044 U2.6 2430.24,2044 2463,2076.76 2463,2100.84 2556.16,2194 3378,2194 3401,2171 3401,2050.44 R23.1
NetR2_1: R2.1 SHUTDOWN.1 | length 404.3
  Top Layer w10: R2.1 2019.5,310 SHUTDOWN.1
NetR5_1: R5.1 RESET.1 | length 317.7
  Top Layer w10: RESET.1 1090,293 R5.1
NetR16_1: R16.1 U4.1 | length 343.2
  Top Layer w12: U4.1@2560.42,111.73 2579.73,111.73 2654,186 2870,186 R16.1
NetR18_1: R18.1 U3.16 | length 568.2
  Top Layer w10: U3.16 2830.1,2113.9 2856,2088 2856,2029.35 2972.35,1913 3002.4,1913 3003,1912.4 3042.12,1912.4 3130.62,1823.9 R18.1
NetR18_2: R18.2 R19.2 U3.15 | length 1179.3
  Top Layer w10: U3.15 2774.01,2093.87 2813.54,2093.87 2838,2069.41 2838,2021.89 2965.49,1894.4 2999.6,1894.4 3038,1856 3038,1446 3060.1,1423.9 R18.2 R19.2
NetR21_2: R21.2 U2.8 | length 1034
  Top Layer w10: U2.8 U2.8@2428.86,2144 ; U2.8@2422.48,2137.62 U2.8@2428.86,2144 ; U2.8@2434.9,2150.04 U2.8@2428.86,2144 ; R21.2 3182.33,2241.86 3176.47,2236 2535,2236 2443,2144 U2.8@2428.86,2144
NetR22_2: R22.2 U2.5 | length 2417.9
  Top Layer w10: U2.5 2430.24,1994 2464.95,2028.71 2464.95,2053.25 2578.7,2167 3280,2167 3290,2157 3290,1985.86 3295.86,1980 3498.14,1980 3504,1985.86 3504,2208.16 3484,2228.16 3484,2493.14 3478.14,2499 3032.9,2499 R22.2
NetU1_33: U1.33 U3.5 | length 1037.6
  Top Layer w10: U3.5 2605.99,2034.81 2560.69,2034.81 2551,2025.12 2536.95,2011.07 2536.95,1871.05 2668,1740 2830,1740 2851.43,1718.57 U1.33
NetU1_34: U1.34 U3.4 | length 1059.3
  Top Layer w10: U3.4 2605.99,2054.5 2554.92,2054.5 2533,2032.58 2518.95,2018.53 2518.95,1863.59 2665.54,1717 2813.65,1717 2831.74,1698.91 U1.34
NetU1_36: U1.36 U3.2 | length 1111.9
  Top Layer w10: U3.2 2543.72,2094.21 2482.95,2033.44 2482.95,1838.05 2643,1678 2779.14,1678 2792.37,1664.77 U1.36
RESET: J1.10 U1.7 U4.2 U7.6 | length 3160.7
  Top Layer w10: J1.10@2168.05,2617.92 2170.92,2617.92 2171,2618 v1(2171,2236) ; U7.6 2303,1421.86 2297.14,1416 2258.62,1416 2251,1408.38 ; v1(2441,1541) 2370.38,1541 2347.38,1518 2260.62,1518 2251,1508.38 2251,1408.38 ; 2514.89,765.17 2411,869.05 2411,1152.38 2347.38,1216 2260.62,1216 2251,1225.62 2251,1408.38 ; U4.2@2578,480 2517.58,480 2511.72,485.86 2511.72,762 2668.4,762 2674.26,767.86 U1.7
  Bottom Layer w10: v1@2169.5,2236.5 2169.5,2109.5 2060,2000 2060,1969.36 2089.36,1940 2282.54,1940 2448,1774.54 2448,1553.41 2441,1546.41 v1(2441,1541)
RESET_FromBuff: R5.2 U7.14 | length 1261.2
  Top Layer w12: R5.2@1092,957 1092,1076.97 1099.03,1084 1277,1261.97 1277,1480.97 1284.03,1488 1929,1488 U7.14
SHUTDOWN: J4.2 R2.2 U7.17 | length 2113
  Top Layer w10: v1(1736.5,2408.5) 1736.5,2341.07 2021,2056.57 2021,1372.93 1990.07,1342 U7.17 1775.86,1342 1770,1336.14 R2.2@1770,957
  Bottom Layer w10: J4.2 1498,2482.43 1498,2412.86 1503.86,2407 1735,2407 v1(1736.5,2408.5) v1@1738,2410
SHUTDOWN_BUFF: U1.23 U7.3 | length 734.5
  Top Layer w10: U7.3 2331,1292 2379,1244 2517.26,1244 2736.01,1025.24 U1.23
SWCLK: J1.4 R9.1 R11.2 U1.49 | length 3069.4
  Top Layer w10: v1(2258,2281) 2320,2281 2337,2298 J1.4@2337,2592.05 ; v1@2417,1203 2418,1202 v1(2418,1194.5) 2424.74,1201.24 2479.39,1201.24 U1.49
  Top Layer w12: R11.2 2171.67,3193.67 R9.1 ; J1.4@2337,2597.55 J1.4@2337,2599
  Bottom Layer w10: v1(2258,2281) 2258,2301 2243,2316 2170,2316 2121,2267 2121,2161 2022,2062 2022,1956.45 2074.45,1904 2170,1904 2172,1902 2250,1902 2412,1740 2412,1590 2393,1571 2393,1514 2418,1489 v1(2418,1194.5) ; J1.4 2331,2604.97 2370.97,2565 2418.14,2565 2424,2570.86 2424,2701 2379.33,2745.67 R9.1
SWDIO: J1.2 R8.1 U1.46 | length 2579.3
  Top Layer w10: v1(2457,1293) 2518.32,1293 2545.25,1319.94 2586.73,1319.94 2595.01,1311.66 2595.01,1278.51 U1.46
  Top Layer w12: v1(2209,2270) 2213.87,2270 2233.87,2250 2317,2250 2356,2289 2356,2578.55 2381,2603.55 J1.2 ; J1.2@2386,2614.31 2386,2619.5 2391.19,2614.31 2402.29,2614.31 2404.53,2616.56 2488.56,2616.56 2588,2716 2588,2985 R8.1
  Bottom Layer w10: v1(2209,2270) 2206,2273 2165.57,2273 2139,2246.43 2139,2118 2042,2021 2042,1961.9 2081.9,1922 2264,1922 2430,1756 2430,1582.54 2411,1563.54 2411,1521.46 2440,1492.46 2440,1367.21 2457,1350.21 v1(2457,1293)
SWO: J1.6
VCC_3.3V: C4.2 C5.2 C12.2 C13.2 C14.2 C15.2 C16.2 C19.2 J1.1 R8.2 R9.2 R20.2 U1.13 U1.19 U1.32 U1.48 U1.64 U3.6 U5.2 | length 12415.2
  Top Layer w10: U1.64 2532.13,907.13 2540.48,915.48 2754.52,915.48 ; U1.48 2556.66,1277.49 2556.66,1238.57 2636.23,1159 2727,1159 2779,1211 2897.22,1211 2903.08,1205.14 2903.08,1202.92 2903.59,1202.41 U1.32 2960.68,1202.41 ; v1(2573.04,1897.38) 2573.04,1950.18 2554.95,1968.27 2554.95,2003.62 2566.46,2015.13 2605.99,2015.13 U3.6 ; v1(2695,973) 2697,973 2754.52,915.48 ; U1.13@2791.86,818 2791.86,831.03 U1.13 2792.88,832.06 2792.88,877.12 2754.52,915.48 ; v1(2861,971) 2864.43,971 2888.41,947.02 2926.5,947.02 U1.19 2963.09,946.5 ; 2960.68,1201.9 2968.95,1193.62 2968.95,952.36 2963.09,946.5 ; C19.2@3316.86,577 3316.86,919.14 3289.5,946.5 2963.09,946.5 ; C19.2@3321.86,587.3 3320.66,586.1 3321.71,585.05 R20.2@3621,585.05
  Top Layer w12: U5.2@303,1512 U5.2 628.97,1523 655,1549.03 C16.2 654,1700 654,1969.5 654,2240 654,2368 C4.2 ; J1.1 2386,2663 2445,2663 2476,2694 2476,3275 R8.2
  Bottom Layer w12: C4.2 647,2375 65,2375 57.97,2382.03 57.97,2391.97 61,2395 61,3407.97 68.03,3415 2044.41,3415 2071.41,3442 2323.33,3442 R9.2 R8.2 ; C16.2 655,1239.03 662.03,1232 2152,1232 2235,1149 2437,1149 2476,1188 2476,1248 2573.04,1248 ; v1(2573.04,1897.38) 2573.04,1248 ; v1@2695,970.5 2860.5,970.5 v1(2861,971) ; v1(2695,973) 2602,1066 2602,1221 2578,1245 2578,1248 2573.04,1248
VCC_5V: C2.2 C17.2 C18.2 C20.2 R6.2 R16.2 U2.3 U3.7 U3.8 U3.9 U3.12 U6.3 U7.20 | length 8551.1
  Top Layer w10: U3.7 U3.8 2638.82,1976.1 2680.92,1934 v1(2749.37,1934) 2753.73,1934 2795,1975.27 2794.16,1976.1 U3.9 2773.32,1976.45 2733.78,1976.45 2720,1990.23 2720,2021.03 2733.78,2034.81 2773.32,2034.81 U3.12
  Top Layer w12: U6.3 444.25,1929 583,2067.75 583,2412 610.03,2439.03 653,2439.03 C17.2 C2.2 ; U7.20 U7.20@1949,1192 ; U7.20@1949,1194 1989.49,1194 2037.49,1146 v2(2038,1146) ; U2.3 2152.21,2044 v1(2112.32,2004.11) 2090,1981.79 2090,1209.03 2038,1157.03 v2(2038,1146) ; 2832.03,590.97 2835.45,587.55 R16.2@2872.45,587.55 ; R16.2 R16.2@2872.45,587.55 ; C18.2@3179.55,587.55 R16.2@2872.45,587.55 ; v2(2038,1146) 2134,1146 2374,906 2374,518 2541,351 2820,351 2873.03,404.03 2873.03,586.97 R16.2@2872.45,587.55
  Bottom Layer w12: U6.3 235,1929 179,1873 179,1329 311.03,1196.97 421.66,1196.97 ; R6.2 809,903.5 564.67,903.5 421.66,1046.51 421.66,1196.97 ; v2(2038,1146) 2001,1146 1950.03,1196.97 421.66,1196.97 ; v1(2112.32,2004.11) 2145.66,2037.44 2273.21,2165 2518.37,2165 v1(2749.37,1934)
pads on no net: J1.7 J1.8 J4. J4.6 J4.7 J4.8 J5. U1.1 U1.2 U1.3 U1.4 U1.5 U1.6 U1.8 U1.9 U1.10 U1.11 U1.17 U1.20 U1.21 U1.22 U1.24 U1.25 U1.26 U1.27 U1.28 U1.29 U1.30 U1.37 U1.38 U1.39 U1.40 U1.42 U1.43 U1.50 U1.51 U1.52 U1.53 U1.54 U1.55 U1.56 U1.57 U1.58 U1.59 U1.60 U1.61 U1.62 U4.3 U7.11 U7.12

## Polygon pours and split planes (outlines as drawn)
GND on Bottom Layer "Bottom Layer-No Net" (solid, remove dead copper, pour order 0): 0,69 67,2 3968,2 3968,3490 50,3490 0,3440

## Text inside footprints (layer, text, board x,y; h text height)
J1: Top Overlay "1" at 2487.02,2690.01 h50 r180; Top Overlay "2" at 2487.02,2625.99 h50 r180; Top Overlay "9" at 2076,2703 h50 r180; Top Overlay "10" at 2096,2618 h50 r180; Mechanical 13 "1" at 2487.02,2690.01 h50 r180; Mechanical 13 "2" at 2487.02,2625.99 h50 r180